# Altium PCB PCB_esp32-s2_2023-01-05.pcbdoc
Units mil, origin at the board's own origin, x right, y up, seen from the top; angles counter-clockwise.
Board outline 2866.43 x 2059.06 mil, 2 copper layers (Top Layer, Bottom Layer); 23 components, 58 nets, 162 pads, 49 vias.
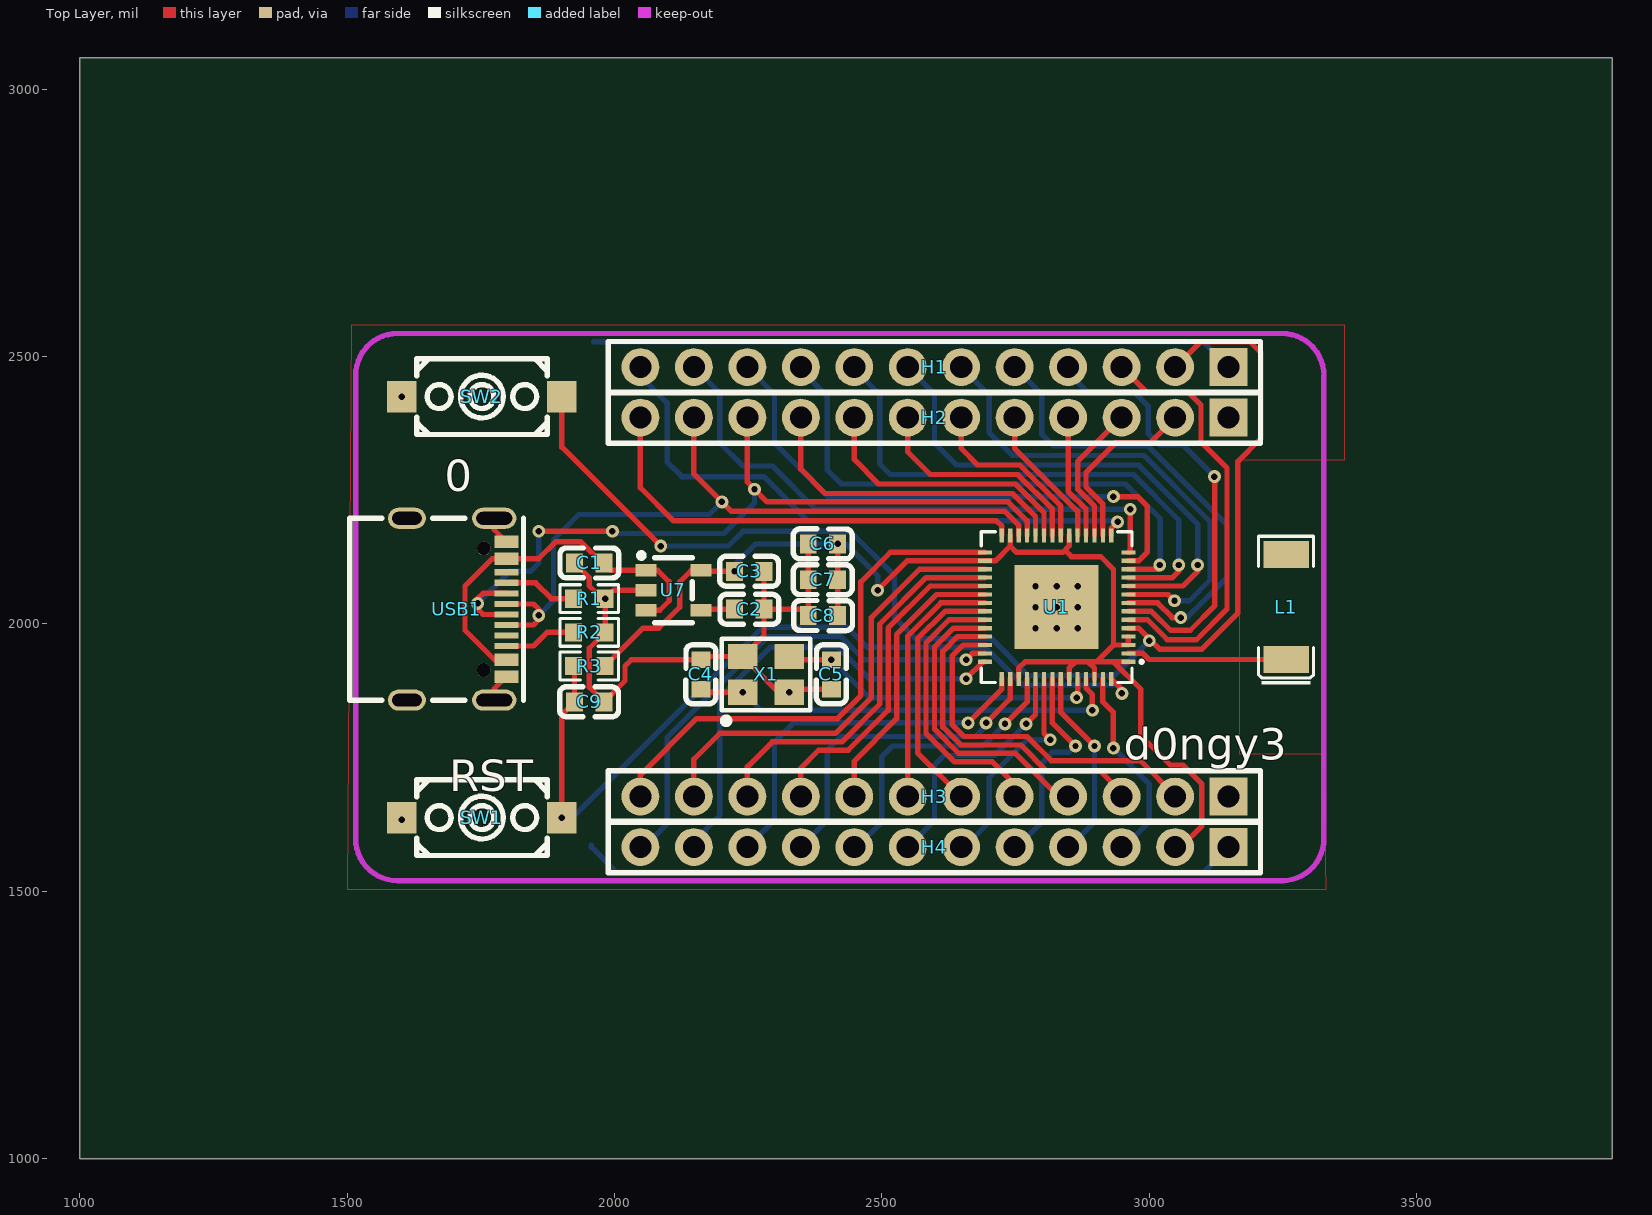
[diagram p0: Top Layer view]
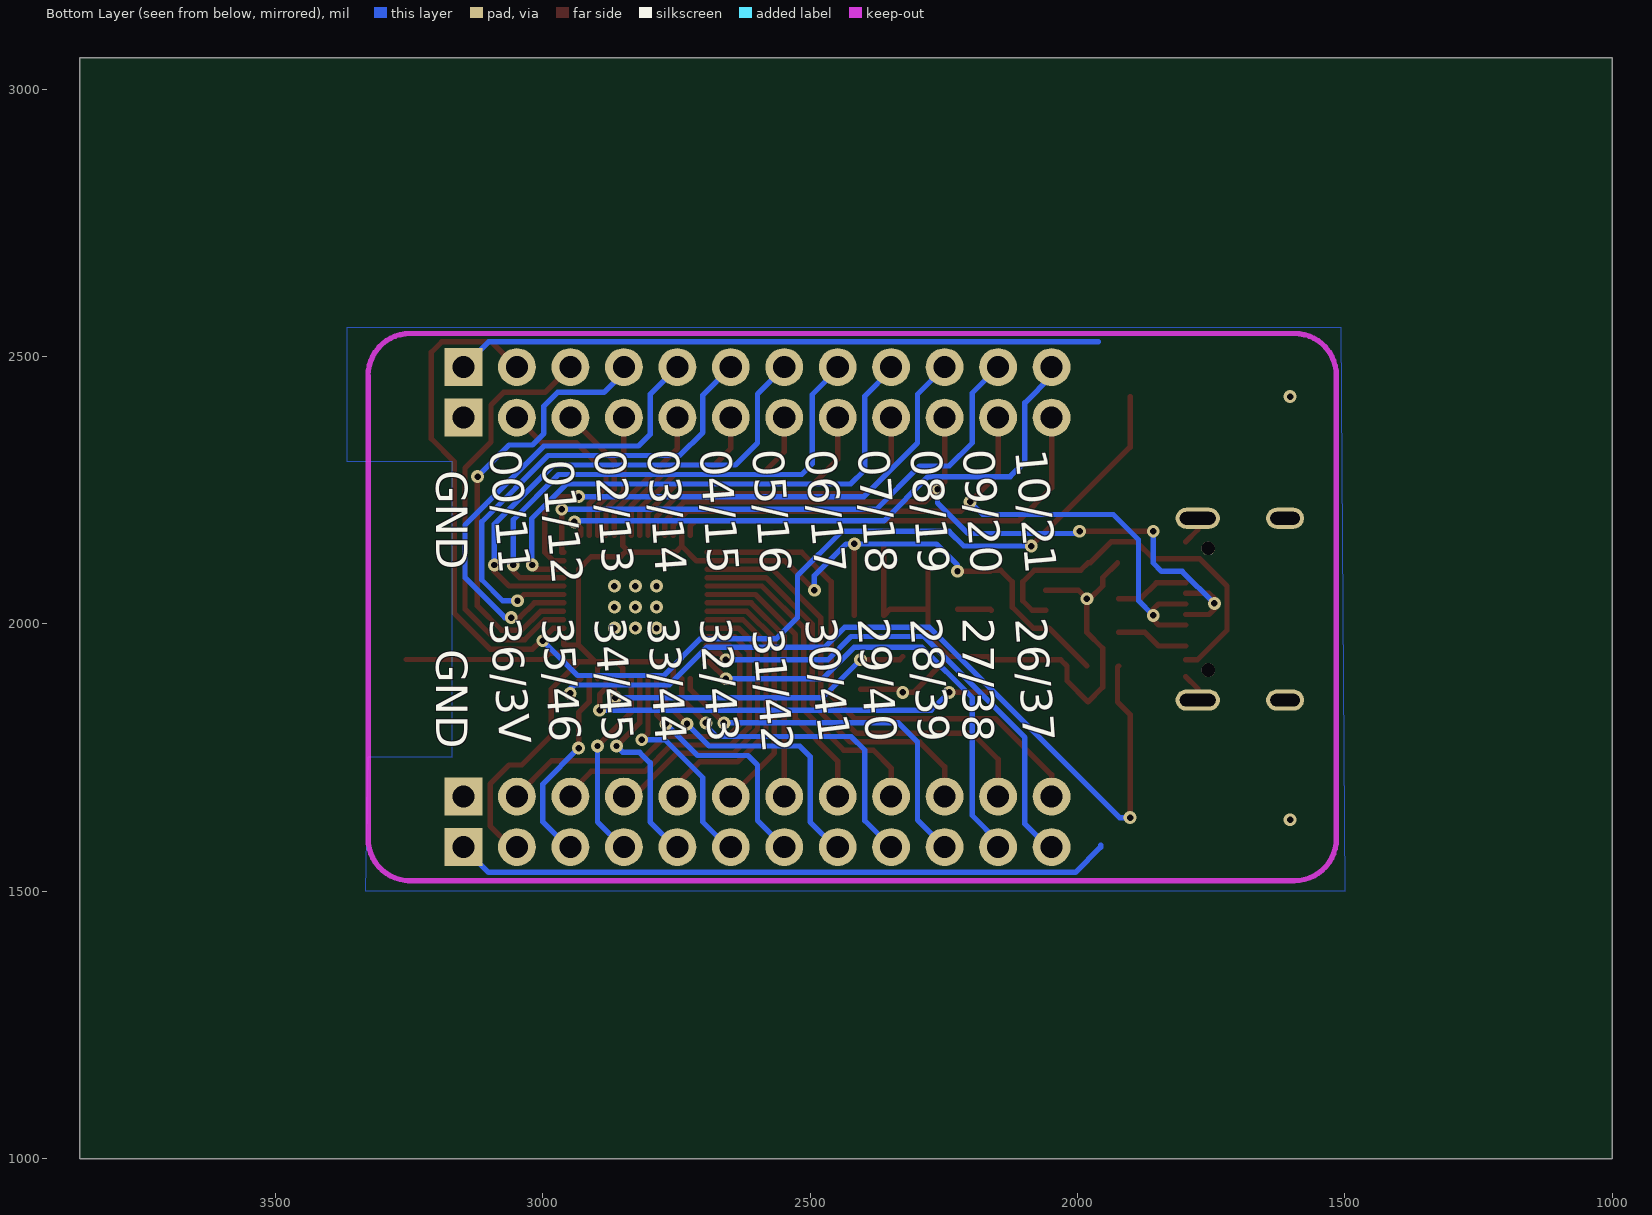
[diagram p1: Bottom Layer view, seen from below]

## Layer stack, top to bottom
Top Layer: signal copper (thickness not stored)
Dielectric: dielectric 12.6, FR-4, Dk 4.8
Bottom Layer: signal copper (thickness not stored)

## Board outline
3866.43,1000 1000,1000 1000,3059.06 3866.43,3059.06

## Components (designator, comment, footprint, x,y, rotation, side; value= is the part's Value field where it differs from the comment)
C1 "1uF" C0603 1953.04,2114.18 r180 top
C2 "22nF" C0603 2252.25,2027.57 r180 top
C3 "1uF" C0603 2252.25,2098.44 r0 top
C4 "20pF" C0603 2161.7,1905.52 r270 top
C5 "20pF" C0603 2405.79,1905.52 r270 top
C6 "100pF" C0603 2390.04,2149.62 r0 top
C7 "1uF" C0603 2390.04,2082.69 r0 top
C8 "100nF" C0603 2390.04,2015.76 r180 top
C9 "100nF" C0603 1953.04,1854.34 r0 top
H1 "A2541WV-16P" HDR-TH_12P-P2.54-V_A2541HWV-12P 2598.7,2480.32 r180 top
H2 "A2541WV-16P" HDR-TH_12P-P2.54-V_A2541HWV-12P 2598.7,2385.84 r180 top
H3 "A2541WV-16P" HDR-TH_12P-P2.54-V_A2541HWV-12P 2598.7,1677.17 r180 top
H4 "A2541WV-16P" HDR-TH_12P-P2.54-V_A2541HWV-12P 2598.7,1582.69 r180 top
L1 "KH-5220-A56" ANT-SMD_L5.2-W2.0 3256.18,2031.51 r90 top
R1 "5.1K" R0603 1953.04,2047.25 r0 top
R2 "5.1K" R0603 1953.04,1984.26 r0 top
R3 "10K" R0603 1953.04,1921.27 r0 top
SW1 "K2-1107ST" KEY-SMD_L6.2-W3.6-LS8.0 1752.25,1637.81 r180 top
SW2 "K2-1107ST" KEY-SMD_L6.2-W3.6-LS8.0 1752.25,2425.21 r180 top
U1 "ESP32-S2FH4" QFN-56_L7.0-W7.0-P0.40-TL-EP4.0 2827.05,2031.51 r180 top
U7 "RT9193-33GB" SOT-23-5_L3.0-W1.7-P0.95-LS2.8-BR 2110.52,2063 r180 top
USB1 "TYPE-C 16P(073)" USB-C-SMD_TYPE-C16PIN_C668624 1705,2027.57 r270 top
X1 "40MHz" OSC-SMD_4P-L3.2-W2.5-BL_SIT8008BI 2283.74,1905.52 r0 top

## Footprints (in the part's own frame and the unit in brackets; to place one, negate y for a bottom-side part, rotate by r counter-clockwise, add the part's x,y. Pads: shape width x height; smd on the part's side, far side on the other; paste and mask are expansions set on the pad)
ANT-SMD_L5.2-W2.0 [mm]
  rect 1.283x2.16 smd: 1(-2.491,0) 2(2.491,0)
  silkscreen extent -3.67,-1.31 3.36,1.31
C0603 [mm]
  rect 0.8x0.9 smd: 1(-0.7,0) 2(0.7,0)
  silkscreen extent -1.41,-0.71 1.39,0.72
HDR-TH_12P-P2.54-V_A2541HWV-12P [mm]
  rect 1.8x1.8 hole 1.05: 1(-13.97,0)
  round 1.8 hole 1.05: 2(-11.43,0) 3(-8.89,0) 4(-6.35,0) 5(-3.81,0) 6(-1.27,0) 7(1.27,0) 8(3.81,0) 9(6.35,0) 10(8.89,0) 11(11.43,0) 12(13.97,0)
  silkscreen extent -15.49,-1.22 15.5,1.22
KEY-SMD_L6.2-W3.6-LS8.0 [mm]
  rect 1.4x1.5 smd: 1(-3.8,0) 2(3.8,0)
  silkscreen extent -3.1,-1.8 3.1,1.8
OSC-SMD_4P-L3.2-W2.5-BL_SIT8008BI [mm]
  rect 1.4x1.2 smd: 1(-1.1,-0.85) 2(1.1,-0.85) 3(1.1,0.85) 4(-1.1,0.85)
  silkscreen extent -2.1,-2.35 2.1,1.7
QFN-56_L7.0-W7.0-P0.40-TL-EP4.0 [mm]
  rect 0.665x0.2 smd: 1(-3.407,2.6) 2(-3.407,2.2) 3(-3.407,1.8) 4(-3.407,1.4) 5(-3.407,1) 6(-3.407,0.6) 7(-3.407,0.2) 8(-3.407,-0.2) 9(-3.407,-0.6) 10(-3.407,-1) 11(-3.407,-1.4) 12(-3.407,-1.8) 13(-3.407,-2.2) 14(-3.407,-2.6) 29(3.408,-2.6) 30(3.408,-2.2) 31(3.408,-1.8) 32(3.408,-1.4) 33(3.408,-1) 34(3.408,-0.6) 35(3.408,-0.2) 36(3.408,0.2) 37(3.408,0.6) 38(3.408,1) 39(3.408,1.4) 40(3.408,1.8) 41(3.408,2.2) 42(3.408,2.6)
  rect 0.2x0.665 smd: 15(-2.6,-3.407) 16(-2.2,-3.407) 17(-1.8,-3.407) 18(-1.4,-3.407) 19(-1,-3.407) 20(-0.6,-3.407) 21(-0.2,-3.407) 22(0.2,-3.407) 23(0.6,-3.407) 24(1,-3.407) 25(1.4,-3.407) 26(1.8,-3.407) 27(2.2,-3.407) 28(2.6,-3.407) 43(2.6,3.408) 44(2.2,3.408) 45(1.8,3.408) 46(1.4,3.408) 47(1,3.408) 48(0.6,3.408) 49(0.2,3.408) 50(-0.2,3.408) 51(-0.6,3.408) 52(-1,3.408) 53(-1.4,3.408) 54(-1.8,3.408) 55(-2.2,3.408) 56(-2.6,3.408)
  rect 4x4 smd: 57(0,0)
  silkscreen extent -4.11,-3.58 3.58,3.58
R0603 [mil]
  rect 31.75x34.02 smd: 1(-29.65,0) 2(29.65,0)
  silkscreen extent -55,-26 55,26
SOT-23-5_L3.0-W1.7-P0.95-LS2.8-BR [mm]
  rect 1x0.6 smd: 1(1.3,-0.95) 2(1.3,0) 3(1.3,0.95) 4(-1.3,0.95) 5(-1.3,-0.95)
  silkscreen extent -0.9,-1.78 1.65,1.55
USB-C-SMD_TYPE-C16PIN_C668624 [mm]
  oval 1x2.1 hole 0.6 slot 1.7 at 90 deg: 1(-4.32,1.787) 2(4.32,1.787)
  oval 1x1.8 hole 0.6 slot 1.4 at 90 deg: 3(-4.32,-2.362) 4(4.32,-2.362)
  rect 0.6x1.15 smd: A1B12(-3.2,2.362) A4B9(-2.4,2.362) B1A12(3.2,2.362) B4A9(2.4,2.362)
  rect 0.3x1.15 smd: A5(-1.25,2.362) A6(-0.25,2.362) A7(0.25,2.362) A8(1.25,2.362) B5(1.75,2.362) B6(0.75,2.362) B7(-0.75,2.362) B8(-1.75,2.362)
  round 0.65 hole 0.65 unplated: ""(-2.89,1.288) ""(2.89,1.288)
  silkscreen extent -4.32,-5.08 4.32,3.17

## Via types
v1: diameter 24, hole 12, Top Layer to Bottom Layer, tented both sides, 49 vias

## Nets (pads, with @x,y where several pads share a name; then routed paths per layer and width w, separated by ;. In a path a pad name is that pad's centre, name@x,y a point inside that pad or via, vN(x,y) a via of type N, cw(c..) or ccw(c..) an arc to the next point about the centre after c; other vN are vias at no path point)
CHIP_PU: C9.1 R3.1 SW1.1 U1.56 | length 1580.3
  Top Layer w10: v1(1901.86,1637.81) 1901.86,1830.72 C9.1@1925.43,1854.3 ; R3.1 1925.47,1919.17 C9.1 ; U1.56@2929.41,1897.35 2949.1,1877.66 v1(2949.1,1870.09)
  Bottom Layer w10: v1@1901.83,1637.8 1921.53,1637.8 2277.83,1994.1 2435.33,1994.1 2472.73,1956.69 2693.23,1956.69 2764.03,1885.8 2941.23,1885.8 2949.13,1877.99 v1(2949.1,1870.09)
GND: C1.2 C2.1 C3.2 C4.1 C5.2 C6.1 C7.1 C8.2 C9.2 H1.1 H2.1 H3.1 H4.1 R1.2 R2.2 SW1.2 SW2.2 U1.57 U7.2 USB1.1 USB1.2 USB1.3 USB1.4 USB1.A1B12 USB1.B1A12 X1.2 X1.4 | length 3850.4
  Top Layer w10: USB1.2 1775.37,1878.95 USB1.B1A12 ; USB1.1 1775.37,2176.2 USB1.A1B12 ; C1.2 1953.03,2086.62 1953.03,2070.88 1976.66,2047.26 v1(1982.7,2047.26) ; C9.2 1953.03,1881.9 1953.03,1954.6 R2.2 v1(1982.7,2047.26) ; C9.2 2019.93,1893.69 2019.93,1921.3 2031.73,1933.1 C4.1 ; U7.2 1998.44,2063 v1(1982.7,2047.26) ; C4.1 2167.6,1938.98 X1.4 ; C3.2 C2.1 ; v1(2327.06,1872.06) 2307.36,1872.05 X1.4 ; X1.2@2327.03,1872.1 2327.03,1877.99 C5.2 ; C6.1 C8.2 2350.67,2027.57 C2.1 ; X1.4 2279.81,1978.36 C2.1
  Bottom Layer w10: 1956.97,1586.62 1956.97,1582.69 2004.22,1535.44 3101.46,1535.44 H4.1 ; 1960.91,2527.57 3101.46,2527.57 H1.1
  other v1: 1602.64,1633.87 2787.68,1992.14 2827.05,1992.14 2866.41,1992.14 2787.68,2031.52 2827.05,2031.52 2866.41,2031.51 2787.68,2070.89 2827.03,2070.86 2866.42,2070.89 1602.64,2425.2
GPIO0: H1.2 SW2.1 U1.5 | length 2410.4
  Top Layer w10: SW2.1@1901.85,2425.21 1901.85,2330.72 v1(2086.9,2145.68) ; U1.5 2980.63,1992.1 3000.23,1972.49 3000.23,1968.49 3004.13,1968.49 3019.83,1952.8 3098.73,1952.8 3165.63,2019.69 3165.63,2303.2 3208.93,2346.49 3208.93,2507.89 3189.23,2527.59 3096.03,2527.59 H1.2
  Bottom Layer w10: v1(2086.9,2145.68) 2212.93,2145.7 2240.43,2173.2 2441.23,2173.2 2523.93,2090.59 2523.93,2011.8 2563.23,1972.49 2705.03,1972.49 2773.93,1903.6 2935.33,1903.6 v1@3000.23,1968.49
  other v1: 3000.28,1968.52
GPIO1: H1.3 U1.6 | length 802.9
  Top Layer w10: H1.3@2949.13,2480.3 2996.33,2433.09 3073.53,2433.09 3097.13,2409.49 3097.13,2340.59 3145.93,2291.8 3145.93,2027.6 3088.83,1970.49 3034.13,1970.49 2996.73,2007.89 U1.6@2961.63,2007.89
GPIO2: H1.4 U1.7 | length 830.5
  Top Layer w10: U1.7@2961.63,2023.6 3004.63,2023.6 3040.03,1988.19 3077.03,1988.19 3122.73,2033.89 v1@3122.73,2275.59
  Bottom Layer w10: H1.4 2848.73,2470.49 2886.13,2433.09 2972.73,2433.09 2998.33,2407.49 2998.33,2356.3 3019.93,2334.7 3063.23,2334.7 v1(3122.33,2275.61)
GPIO3: H1.5 U1.8 | length 888.9
  Top Layer w10: U1.8 3016.01,2039.39 3043.58,2011.83 v1(3059.34,2011.83)
  Bottom Layer w10: H1.5 2799.53,2429.49 2799.53,2354.7 2821.53,2332.7 2998.33,2332.7 3145.93,2185.09 3145.93,2086.59 3071.13,2011.8 v1(3059.34,2011.83)
GPIO4: H1.6 U1.9 | length 909.1
  Top Layer w10: U1.9 3035.72,2055.12 v1(3047.53,2043.32)
  Bottom Layer w10: H1.6 2701.03,2427.99 2701.03,2358.3 2744.33,2314.99 2990.43,2314.99 3114.43,2190.99 3114.43,2082.7 3075.13,2043.3 v1(3047.53,2043.32)
GPIO5: H1.7 U1.10 | length 946.9
  Top Layer w10: U1.10 3063.27,2070.88 3090.83,2098.43 v1(3090.83,2110.24)
  Bottom Layer w10: H1.7@2548.73,2480.2 2598.73,2430.2 2598.73,2338.59 2640.13,2297.3 2980.63,2297.3 3090.83,2186.99 v1(3090.83,2110.24)
GPIO6: H1.8 U1.11 | length 998.6
  Top Layer w10: U1.11 3043.59,2086.62 3055.4,2098.43 v1(3055.4,2110.24)
  Bottom Layer w10: H1.8@2448.73,2480.2 2448.73,2476.8 2496.33,2429.09 2496.33,2299.2 2515.93,2279.49 2970.73,2279.49 3055.43,2194.89 v1(3055.4,2110.24)
GPIO7: H1.9 U1.12 | length 1023.7
  Top Layer w10: U1.12 3016.03,2102.37 3019.97,2106.31 v1(3019.97,2110.24)
  Bottom Layer w10: H1.9@2349.73,2476.39 2349.73,2474.49 2397.93,2426.3 2397.93,2288.39 2424.43,2261.8 2955.93,2261.8 3020.93,2196.89 v1@3020.93,2106.39
GPIO8: H1.10 U1.13 | length 1036.8
  Top Layer w10: v1(2933.35,2238.2) 2978.64,2238.2 2996.34,2220.49 2996.34,2133.87 2980.57,2118.1 U1.13
  Bottom Layer w10: H1.10 2299.49,2429.54 2299.49,2338.59 2399.89,2238.2 v1(2933.35,2238.2)
GPIO9: H1.11 U1.14 | length 1065.2
  Top Layer w10: U1.14 2964.85,2133.86 v1(2964.85,2214.57)
  Bottom Layer w10: H1.11 2197.13,2431.89 2197.13,2338.59 2240.43,2295.3 2295.53,2295.3 2376.25,2214.57 v1(2964.85,2214.57)
GPIO10: H1.12 U1.15 | length 1118.1
  Top Layer w10: U1.15 2929.43,2179.16 v1(2941.22,2190.95)
  Bottom Layer w10: H1.12 2048.73,2463.4 2098.73,2413.4 2098.73,2303.2 2126.23,2275.6 2279.83,2275.6 2362.53,2192.9 2941.22,2192.9 v1(2941.22,2190.95)
GPIO11: H2.2 U1.16 | length 339.9
  Top Layer w10: U1.16@2913.63,2165.7 2913.63,2224.49 2882.13,2255.99 2882.13,2283.49 2937.33,2338.59 3001.93,2338.59 H2.2
GPIO12: H2.3 U1.17 | length 267.2
  Top Layer w10: U1.17 2897.93,2220.49 2866.43,2251.99 2866.43,2303.49 H2.3
GPIO13: H2.4 U1.18 | length 233.9
  Top Layer w10: H2.4 2848.73,2247.99 2882.13,2214.59 U1.18@2882.13,2165.7
GPIO14: H2.5 U1.19 | length 268.8
  Top Layer w10: H2.5 2748.73,2328.39 2866.43,2210.59 U1.19
GPIO15: H2.6 U1.21 | length 343.3
  Top Layer w10: H2.6 2648.73,2327.99 2679.43,2297.3 2758.13,2297.3 2834.93,2220.49 U1.21
GPIO16: H2.7 U1.22 | length 427.8
  Top Layer w10: H2.7 2548.73,2321.7 2590.83,2279.49 2754.23,2279.49 2819.13,2214.59 U1.22@2819.13,2165.7
GPIO17: H2.8 U1.23 | length 517
  Top Layer w10: H2.8 2448.73,2307.49 2494.33,2261.8 2750.33,2261.8 2803.43,2208.7 U1.23
GPIO18: H2.9 U1.24 | length 607.2
  Top Layer w10: H2.9 2348.73,2289.39 2394.03,2244.09 2744.33,2244.09 2787.73,2200.8 U1.24
GPIO21: H2.12 U1.28 | length 854.1
  Top Layer w10: H2.12 2048.73,2254.7 2110.53,2192.89 2714.83,2192.89 2724.73,2182.99 U1.28
GPIO26: H3.12 U1.29 | length 981.7
  Top Layer w10: H3.12 2048.73,1717.69 2153.83,1822.8 2417.63,1822.8 2460.93,1866.19 2460.93,2078.8 2516.03,2133.89 U1.29
GPIO27: H3.11 U1.31 | length 848.8
  Top Layer w10: H3.11 2148.73,1746.89 2197.13,1795.3 2413.63,1795.3 2480.63,1862.19 2480.63,2011.8 2571.13,2102.39 U1.31
GPIO28: H3.10 U1.32 | length 733.9
  Top Layer w10: H3.10 2248.73,1732.69 2295.53,1779.49 2425.43,1779.49 2496.33,1850.39 2496.33,1999.99 2582.93,2086.59 U1.32
GPIO29: H3.9 U1.33 | length 628.4
  Top Layer w10: H3.9 2348.73,1730.3 2382.13,1763.8 2437.33,1763.8 2512.13,1838.6 2512.13,1992.1 2590.83,2070.89 U1.33
GPIO30: H3.8 U1.34 | length 531.9
  Top Layer w10: H3.8 2448.73,1743.69 2527.83,1822.8 2527.83,1980.3 2602.63,2055.09 U1.34
GPIO31: H3.7 U1.35 | length 470.2
  Top Layer w10: H3.7 2548.73,1977.6 2610.53,2039.39 U1.35
GPIO32: H3.6 U1.36 | length 475.9
  Top Layer w10: H3.6 2567.23,1758.69 2567.23,1972.49 2618.43,2023.6 U1.36
GPIO33: H3.5 U1.37 | length 525.5
  Top Layer w10: U1.37 2626.23,2007.89 2582.93,1964.6 2582.93,1795.3 2636.13,1742.1 2707.03,1742.1 2748.73,1700.39 H3.5
GPIO34: H3.4 U1.38 | length 564.6
  Top Layer w10: U1.38 2634.13,1992.1 2598.73,1956.69 2598.73,1803.19 2644.03,1757.89 2750.23,1757.89 2830.93,1677.19 H3.4
GPIO35: H3.3 U1.39 | length 624.5
  Top Layer w10: U1.39 2642.03,1976.39 2614.43,1948.8 2614.43,1807.1 2647.93,1773.6 2760.13,1773.6 2809.33,1724.39 2909.73,1724.39 2948.73,1685.39 H3.3
GPIO36: H3.2 U1.40 | length 674.7
  Top Layer w10: U1.40@2694.93,1960.6 2651.93,1960.6 2632.23,1940.99 2632.23,1810.99 2653.83,1789.39 2771.93,1789.39 2817.23,1744.1 2983.83,1744.1 H3.2@3050.73,1677.19
GPIO37: H4.12 U1.41 | length 924.6
  Top Layer w10: v1(2657.76,1933.08) 2669.57,1944.89 U1.41
  Bottom Layer w10: H4.12 2055.43,1582.69 2098.73,1625.99 2098.73,1787.39 2287.72,1976.39 2423.51,1976.39 2466.82,1933.08 v1(2657.76,1933.08)
GPIO38: H4.11 U1.42 | length 872
  Top Layer w10: v1(2657.76,1897.64) 2689.21,1929.09 U1.42
  Bottom Layer w10: H4.11 2148.73,1593.3 2197.13,1641.69 2197.13,1862.19 2291.63,1956.69 2417.63,1956.69 2476.63,1897.6 v1@2657.73,1897.6
GPIO39: H4.10 U1.43 | length 703.2
  Top Layer w10: v1(2661.68,1814.96) 2724.73,1878.01 U1.43@2724.73,1897.39
  Bottom Layer w10: H4.10 2299.53,1633.49 2299.53,1779.49 2335,1814.96 v1(2661.68,1814.96)
GPIO40: H4.9 U1.44 | length 624.5
  Top Layer w10: v1(2695.16,1814.96) 2740.43,1860.23 U1.44@2740.43,1897.39
  Bottom Layer w10: H4.9 2397.93,1631.89 2397.93,1763.8 2423.53,1789.39 2675.43,1789.39 2695.13,1809.1 v1@2695.13,1814.99
GPIO41: H4.8 U1.46 | length 550.3
  Top Layer w10: v1(2730.6,1813.01) 2771.93,1854.33 U1.46@2771.93,1897.39
  Bottom Layer w10: H4.8 2453.03,1582.69 2500.33,1629.89 2500.33,1751.99 2520.03,1771.69 2689.23,1771.69 v1(2730.6,1813.01)
GPIO42: H4.7 U1.47 | length 469
  Top Layer w10: v1(2769.96,1813.01) 2787.73,1830.77 U1.47@2787.73,1897.39
  Bottom Layer w10: H4.7 2598.73,1632.69 2598.73,1736.19 2616.53,1753.99 2710.93,1753.99 v1@2769.93,1812.99
GPIO43: H4.6 U1.48 | length 416.9
  Top Layer w10: U1.48@2803.42,1897.35 2803.42,1795.29 v1(2815.24,1783.47)
  Bottom Layer w10: H4.6 2653.82,1582.69 2701.07,1629.93 2701.07,1712.61 2771.93,1783.47 v1(2815.24,1783.47)
GPIO44: H4.5 U1.49 | length 400.3
  Top Layer w10: U1.49@2819.13,1897.39 2819.13,1814.99 v1(2862.49,1771.66)
  Bottom Layer w10: H4.5 2752.25,1582.69 2799.49,1629.93 2799.49,1740.17 2819.18,1759.85 2850.67,1759.85 v1(2862.49,1771.66)
GPIO45: H4.4 U1.50 | length 362.3
  Top Layer w10: U1.50@2834.93,1897.35 2834.93,1834.65 v1(2897.92,1771.66)
  Bottom Layer w10: H4.4 2850.67,1582.69 2897.92,1629.93 v1(2897.92,1771.66)
GPIO46: H4.3 U1.55 | length 374.4
  Top Layer w10: U1.55@2913.66,1897.35 2913.66,1854.34 2933.35,1834.66 v1(2933.35,1767.72)
  Bottom Layer w10: v1@2933.35,1767.73 3000.28,1700.8 3000.28,1629.93 2953.04,1582.69 H4.3
L1_2: L1.2
S$6004: 
S$6008: 
S$6012: 
S$6016: 
U1_2: L1.1 U1.2 | length 299.7
  Top Layer w10: U1.2 2988.47,1944.89 2999.93,1933.43 L1.1
U7_4: C2.2 U7.4 | length 63.8
  Top Layer w10: U7.4 2163.66,2027.57 C2.2
USB1_A5: R1.1 USB1.A5 | length 137.6
  Top Layer w10: USB1.A5 1852.64,2076.78 1882.17,2047.25 R1.1
USB1_B5: R2.1 USB1.B5 | length 136
  Top Layer w10: USB1.B5 1848.7,1958.67 1874.3,1984.26 R2.1
USB-PWR-DN: H2.10 U1.25 USB1.A7 USB1.B7 | length 1497.6
  Top Layer w10: USB1.A7 1754.23,2017.69 1744.33,2027.6 v1(1744.33,2038.33) 1744.33,2047.3 1754.23,2057.09 USB1.B7 ; v1(1858.55,2173.24) v1(1996.35,2173.24) ; H2.10 2248.7,2265.36 v1(2262.09,2251.97) 2285.71,2228.36 2736.5,2228.36 2771.93,2192.93 U1.25
  Bottom Layer w10: v1(1744.33,2038.33) 1804.43,2098.43 1842.8,2098.43 1858.55,2114.18 v1(1858.55,2173.24) ; v1(1996.35,2173.24) 1996.33,2169.3 2205,2169.3 2262.09,2226.39 v1(2262.09,2251.97)
USB-PWR-DP: H2.11 U1.26 USB1.A6 USB1.B6 | length 1417.6
  Top Layer w10: USB1.B6 1848.73,1997.99 1858.53,2007.89 v1(1858.53,2016.11) 1858.53,2027.6 1848.73,2037.39 USB1.A6 ; H2.11 2148.7,2280.72 v1(2201.07,2228.36) 2218.78,2210.64 2730.59,2210.64 2756.19,2185.04 U1.26
  Bottom Layer w10: v1(1858.53,2016.11) 1886.13,2043.69 1886.13,2157.49 1933.33,2204.7 2177.41,2204.7 v1(2201.07,2228.36)
VBUS: C1.1 U7.1 U7.3 USB1.A4B9 USB1.B4A9 | length 716.1
  Top Layer w10: USB1.A4B9 1858.55,2122.06 1890.04,2153.55 1937.29,2153.55 1976.66,2114.18 C1.1 1994.38,2100.4 U7.1 2080.99,2100.4 2102.64,2078.75 2102.64,2043.32 2084.93,2025.6 U7.3 ; USB1.B4A9 1775.83,1933.1 1720.73,1988.19 1720.73,2070.89 1771.93,2122.09 USB1.A4B9
VCC_3V3: C3.1 C6.2 C7.2 C8.1 H4.2 R3.2 U1.1 U1.3 U1.4 U1.20 U1.27 U1.30 U1.45 U1.51 U1.54 U7.5 | length 2383.6
  Top Layer w10: R3.2 2053.56,1992.13 2082.95,1992.13 2122.33,2031.51 2122.33,2078.75 2143.98,2100.4 U7.5 2163.66,2098.44 v1(2224.69,2098.43) ; C8.1 v1(2417.61,2149.61) ; v1(2492.41,2063.01) 2547.52,2118.12 U1.30 2712.85,2118.12 2740.43,2145.7 ; U1.27 2740.43,2145.7 ; U1.45@2756.23,1900.3 2756.23,1917.3 2768.03,1929.1 2866.43,1929.1 ; 2842.83,2137.8 2854.63,2125.99 2909.73,2125.99 2933.63,2102.09 2933.63,1960.6 ; U1.51@2850.63,1897.39 2850.63,1917.3 2862.43,1929.1 2886.13,1929.1 2897.93,1917.3 U1.54@2897.93,1897.39 ; U1.20@2850.63,2165.7 2850.63,2145.7 2838.83,2133.89 2752.23,2133.89 2740.43,2145.7 ; 2882.13,1929.1 U1.1 ; 2902.07,1929.1 2933.61,1960.64 U1.3 U1.4 ; 2917.26,1929.1 2933.4,1929.1 2984.53,1877.96 2984.53,1791.35 3039.65,1736.23 3063.27,1736.23 3098.7,1700.8 3098.7,1622.06 3059.34,1582.69 H4.2
  Bottom Layer w10: v1(2224.69,2098.43) 2224.73,2110.3 2264.03,2149.59 v1(2417.61,2149.61) 2433.33,2149.59 2492.43,2090.59 v1(2492.41,2063.01)
XTAL_N: C5.1 U1.52 X1.3 | length 606.4
  Top Layer w10: X1.3 2332.96,1933.08 v1(2405.8,1933.09) ; v1@2864.45,1862.21 2866.45,1862.21 U1.52@2866.45,1897.41
  Bottom Layer w10: v1(2405.8,1933.09) 2476.68,1862.19 v1(2864.46,1862.19)
XTAL_P: C4.2 U1.53 X1.1 | length 812.3
  Top Layer w10: C4.2 2167.61,1872.05 v1(2240.44,1872.06) ; U1.53@2882.13,1897.39 2882.13,1879.99 2894.03,1868.1 v1(2893.98,1838.6)
  Bottom Layer w10: v1(2240.44,1872.06) 2273.93,1838.6 v1@2893.93,1838.6
pads on no net: USB1. USB1.A8 USB1.B8

## Polygon pours and split planes (outlines as drawn)
GND on Bottom Layer (solid): 1500.29,1500 3330.99,1500 3327.06,1751.97 3169.58,1751.97 3169.58,2303.15 3366.43,2303.15 3366.43,2555.12 1508.16,2555.12
GND on Top Layer (solid): 1500.28,1503.95 3330.99,1503.95 3327.05,1755.91 3169.57,1755.91 3169.57,2307.1 3366.42,2307.1 3366.42,2559.06 1508.15,2559.06

## Keep-outs
Keep-Out Layer:
  lines w10: 1516.03,1598.43 ccw(c1594.77,1598.43) 1594.77,1519.69 ; 1516.03,2464.58 cw(c1594.77,2464.58) 1594.77,2543.32 ; 3248.31,1519.69 ccw(c3248.31,1598.43) 3327.05,1598.43 ; 3248.31,2543.32 cw(c3248.31,2464.58) 3327.05,2464.58

## Silkscreen, mask and mechanical layers (free items; w line width, h text height)
Top Overlay:
  text "0" at 1734.53,2307.09 h59.05 r180
  text "d0ngy3" at 2953.04,1746.08 h59.05
  text "RST" at 1691.23,1687.02 h59.05
Bottom Overlay:
  text "09/20" at 2214.77,2324.73 h59.05 r86
  text "08/19" at 2313.2,2324.73 h59.05 r86
  text "07/18" at 2411.62,2324.73 h59.05 r86
  text "05/16" at 2608.47,2324.73 h59.05 r86
  text "04/15" at 2706.9,2324.73 h59.05 r86
  text "03/14" at 2805.32,2324.73 h59.05 r86
  text "02/13" at 2903.75,2324.73 h59.05 r86
  text "10/21" at 2116.31,2324.21 h59.05 r85
  text "06/17" at 2510.01,2324.21 h59.05 r85
  text "00/11" at 3100.56,2324.21 h59.05 r85
  text "01/12" at 3002.13,2304.52 h59.05 r85
  text "GND" at 3199.09,2287.41 h59.05 r90
  text "27/38" at 2214.84,2011.83 h59.05 r90
  text "26/37" at 2116.35,2009.77 h59.05 r86
  text "28/39" at 2313.2,2009.77 h59.05 r86
  text "29/40" at 2411.62,2009.77 h59.05 r86
  text "32/43" at 2706.9,2009.77 h59.05 r86
  text "33/44" at 2805.32,2009.77 h59.05 r86
  text "34/45" at 2903.75,2009.77 h59.05 r86
  text "35/46" at 3002.17,2009.77 h59.05 r86
  text "36/3V" at 3100.56,2009.25 h59.05 r85
  text "30/41" at 2509.9,2008.23 h59.05 r83
  text "31/42" at 2608.43,1989.56 h59.05 r85
  text "GND" at 3199.09,1952.77 h59.05 r90